# Altium PCB PCB_Handling_module.PcbDoc
Units mm, origin at the board's own origin, x right, y up, seen from the top; angles counter-clockwise.
Board outline 30.25 x 42.25 mm, 2 copper layers (Top Layer, Bottom Layer); 16 components, 56 nets, 73 pads, 2 vias.
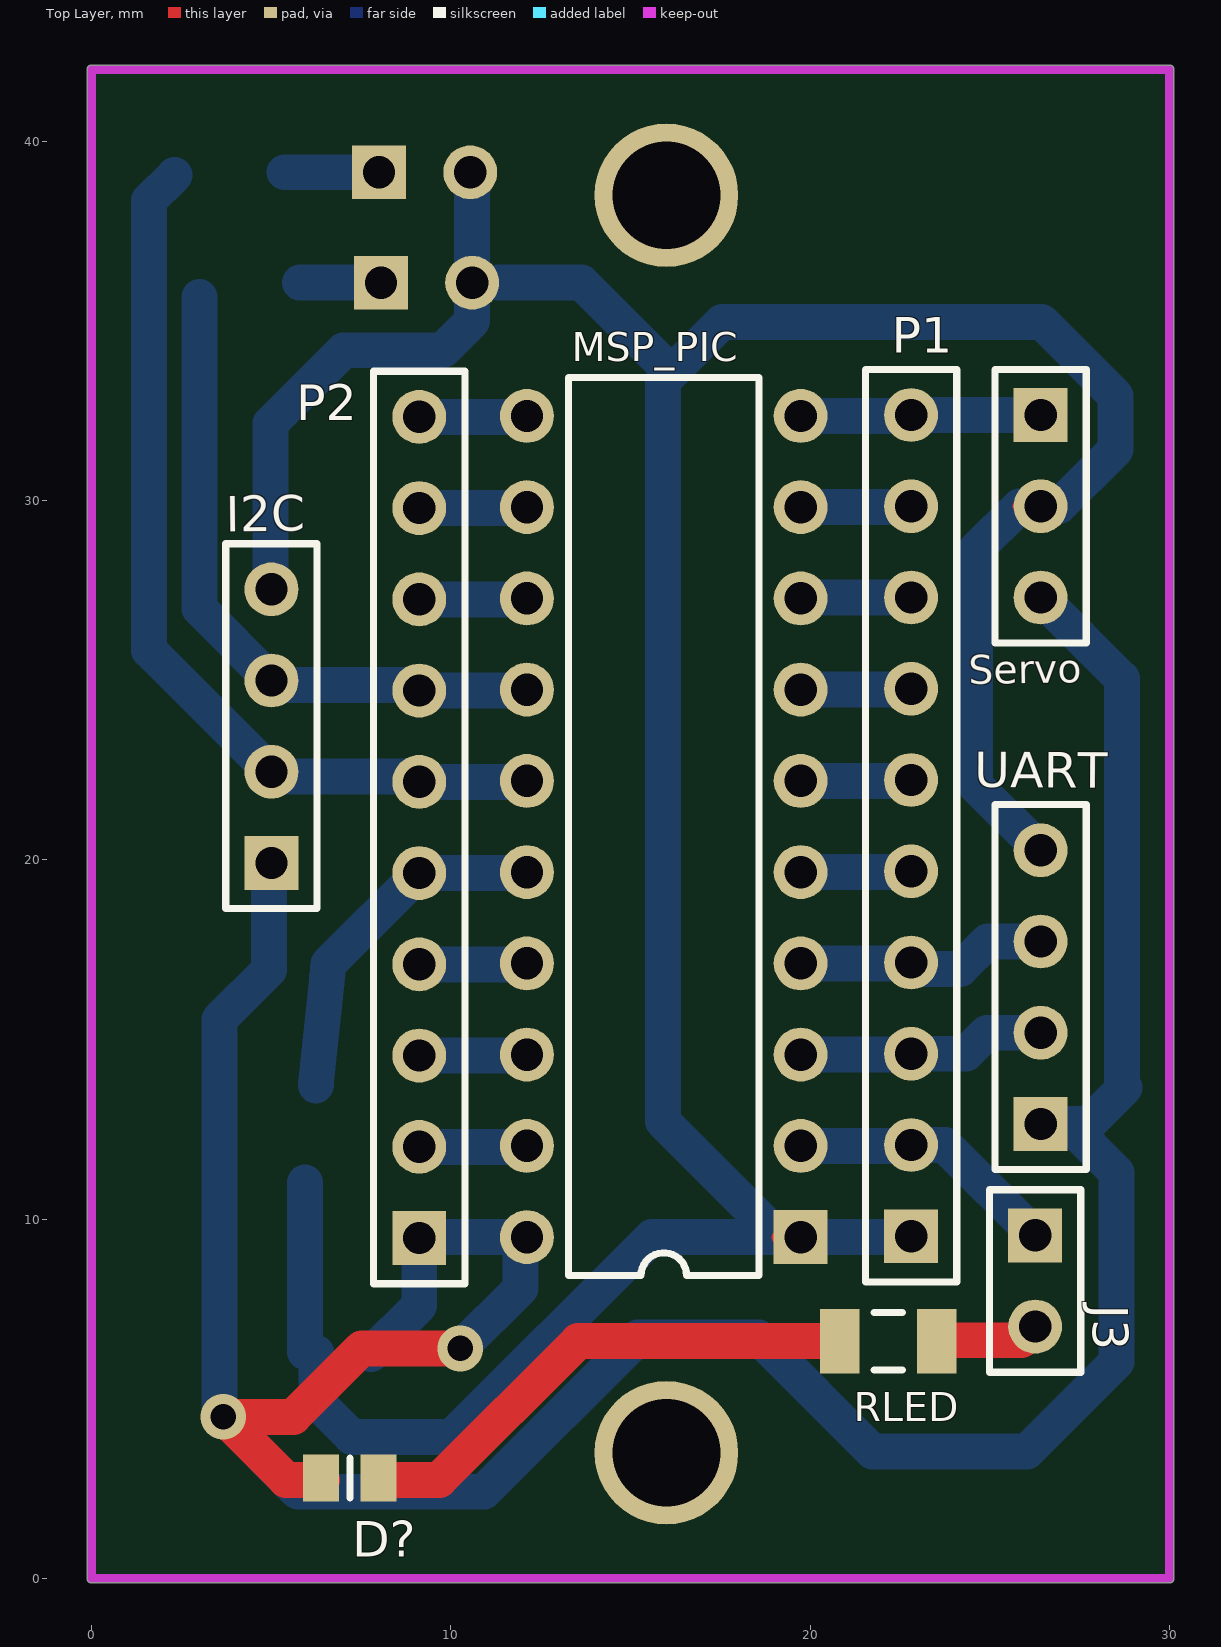
[diagram p0: Top Layer view]
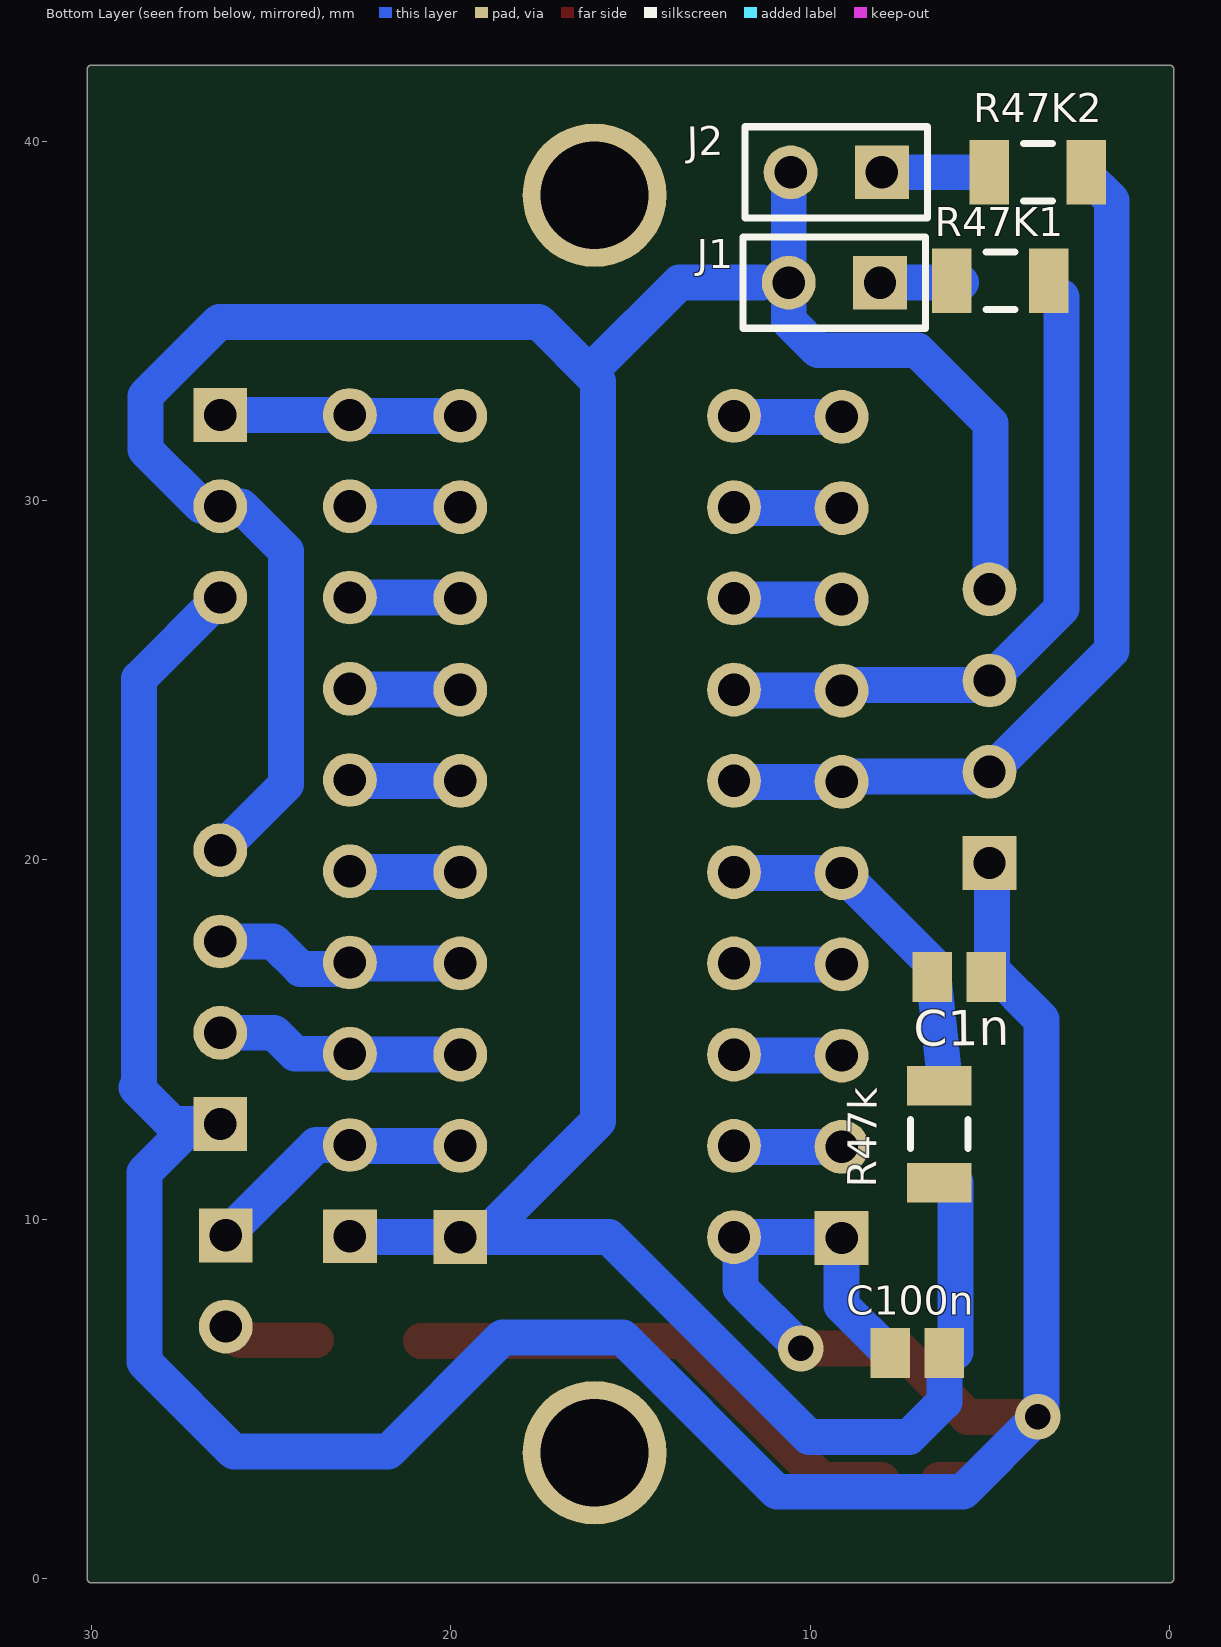
[diagram p1: Bottom Layer view, seen from below]

## Layer stack, top to bottom
Top Solder: solder mask 0.0102, Solder Resist, Dk 3.5
Top Layer: signal copper 0.0356
Dielectric 1: dielectric 0.32, FR-4, Dk 4.8
Bottom Layer: signal copper 0.0356
Bottom Solder: solder mask 0.0102, Solder Resist, Dk 3.5

## Board outline
-0.127,0 ccw(c0,0) 0,-0.127 30,-0.127 ccw(c30,0) 30.127,0 ccw(c30,0) 30.117,0.051 ccw(c30,0.102) 30.127,0.102 30.127,42 ccw(c30,42) 30,42.127 0,42.127 ccw(c0,42) -0.127,42

## Design rules (kind name [scope] priority, off if disabled: settings)
Clearance [All] p1: gap=0.254
PolygonConnect [All] p1: connectstyle=Relief reliefconductorwidth=0.254 reliefentries=4 polygonreliefangle="90 Angle" airgapwidth=0.254
RoomDefinition Sheet_handling_module [InComponentClass('Sheet_handling_module')] p1: confinementstyle=ConfineIn formatcopy=TRUE lockcomponents=FALSE outline -0.124,42.189 30.235,42.189 30.235,0.229 30.081,0.102 -0.124,0.102
RoutingVias [All] p1: holewidth=0.711 width=1.27 viastyle="Through Hole" minholewidth=0.711 minwidth=1.27 maxholewidth=0.711 maxwidth=1.27
SolderMaskExpansion [All] p1: expansion=0.102
Width [All] p1: maxlimit=3 minlimit=0.254 preferedwidth=1 minimp=50.000000 maximp=50.000000 favimp=50.000000
30 further rules are at their usual default settings.

## Components (designator, comment, footprint, x,y, rotation, side; value= is the part's Value field where it differs from the comment)
C1n "Cap Pol3" C0805 5.845,16.739 r180 bottom
C100n "Cap Pol3" C0805 7.013,6.274 r0 bottom
D? "LED3" 6-0805_L 7.191,2.794 r180 top
I2C "I2C_MSP430" HDR1X4 5.006,19.914 r90 top
J1 "Header 2" HDR1X2 8.054,36.068 r0 bottom
J2 "Header 2" HDR1X2 8,39.141 r0 bottom
J3 "Header 2" HDR1X2 26.266,9.55 r270 top
MSP_PIC "Header 10X2A" N020 15.928,20.93 r90 top
P1 "Header 10" HDR1X10 22.812,9.525 r90 top
P2 "Header 10" HDR1X10 9.121,9.474 r90 top
R47k "Res3" INDC3216 6.403,12.37 r270 bottom
R47K1 "Res3" INDC3216 4.702,36.119 r180 bottom
R47K2 "Res3" INDC3216 3.66,39.141 r180 bottom
RLED "Res3" INDC3216 22.177,6.604 r0 top
Servo "Header 3" HDR1X3 26.419,32.385 r270 top
UART "UART_MSP430" HDR1X4 26.419,12.649 r90 top

## Footprints (in the part's own frame and the unit in brackets; to place one, negate y for a bottom-side part, rotate by r counter-clockwise, add the part's x,y. Pads: shape width x height; smd on the part's side, far side on the other; paste and mask are expansions set on the pad)
6-0805_L [mm] "Chip Resistor, Body 2.0x1.2mm, IPC High Density"
  rect 1x1.3 smd: 1(-0.8,0) 2(0.8,0)
  silkscreen extent 0,-0.55 0,0.55, body extent -1.07,-0.7 1.07,0.7, height 0.7
C0805 [mm] "Chip Capacitor, Body 2.0x1.3mm, IPC High Density"
  rect 1.1x1.4 smd: 1(-0.75,0) 2(0.75,0)
  body extent -1.1,-0.72 1.1,0.72, height 1.4
HDR1X2 [mm] "Connector; Header; 2 Position"
  rect 1.5x1.5 hole 0.9: 1(0,0)
  round 1.5 hole 0.9: 2(2.54,0)
  silkscreen extent -1.27,-1.27 3.81,1.27
HDR1X3 [mm] "Connector; Header; 3 Position"
  rect 1.5x1.5 hole 0.9: 1(0,0)
  round 1.5 hole 0.9: 2(2.54,0) 3(5.08,0)
  silkscreen extent -1.27,-1.27 6.35,1.27
HDR1X4 [mm] "Connector; Header; 4 Position"
  rect 1.5x1.5 hole 0.9: 1(0,0)
  round 1.5 hole 0.9: 2(2.54,0) 3(5.08,0) 4(7.62,0)
  silkscreen extent -1.27,-1.27 8.89,1.27
HDR1X10 [mm] "Connector; Header; 10 Position"
  rect 1.5x1.5 hole 0.9: 1(0,0)
  round 1.5 hole 0.9: 2(2.54,0) 3(5.08,0) 4(7.62,0) 5(10.16,0) 6(12.7,0) 7(15.24,0) 8(17.78,0) 9(20.32,0) 10(22.86,0)
  silkscreen extent -1.27,-1.27 24.13,1.27
INDC3216 [mm] "Chip Inductor, Body 3.2x1.6mm, IPC High Density"
  rect 1.1x1.8 smd: 1(-1.35,0) 2(1.35,0)
  silkscreen extent -0.4,-0.8 0.4,0.8, body extent -1.7,-0.9 1.7,0.9, height 0.55
N020 [mm] "DIP; 20 Leads; Row Spacing 7.62 mm; Pitch 2.54 mm"
  rect 1.5x1.5 hole 0.9: 1(-11.43,-3.81)
  round 1.5 hole 0.9: 2(-8.89,-3.81) 3(-6.35,-3.81) 4(-3.81,-3.81) 5(-1.27,-3.81) 6(1.27,-3.81) 7(3.81,-3.81) 8(6.35,-3.81) 9(8.89,-3.81) 10(11.43,-3.81) 11(11.43,3.81) 12(8.89,3.81) 13(6.35,3.81) 14(3.81,3.81) 15(1.27,3.81) 16(-1.27,3.81) 17(-3.81,3.81) 18(-6.35,3.81) 19(-8.89,3.81) 20(-11.43,3.81)
  silkscreen extent -12.5,-2.65 12.5,2.65

## Part data
C1n C100n: "Polarized Capacitor (Surface Mount)"
D?: "Typical BLUE SiC LED"
I2C UART: library part "Header 4", "Header, 4-Pin"
J1 J2 J3: "Header, 2-Pin"
MSP_PIC: "Header, 10-Pin, Dual row"
P1 P2: "Header, 10-Pin"
R47k R47K1 R47K2 RLED: "Resistor"
Servo: "Header, 3-Pin"

## Free pads (board coordinates)
  round 4 hole 3: 2(16,3.5) 2(16,38.5)

## Via types
v1: diameter 1.27, hole 0.711, Top Layer to Bottom Layer, 2 vias

## Nets (pads, with @x,y where several pads share a name; then routed paths per layer and width w, separated by ;. In a path a pad name is that pad's centre, name@x,y a point inside that pad or via, vN(x,y) a via of type N, cw(c..) or ccw(c..) an arc to the next point about the centre after c; other vN are vias at no path point)
3.3V: 
5V: 
5VB: 
GND: 
NetAUX_3: 
NetAUX_6: 
NetAUX_8: 
NetAUX_10: 
NetAUX_11: 
NetAUX_12: 
NetC1n_1: C1n.1 MSP_PIC.16 P2.5 R47k.1 | length 9.7
  Top Layer w0.4: MSP_PIC.16@12.093,19.634 MSP_PIC.16
  Bottom Layer w0.4: R47k.1@6.239,13.682 R47k.1@6.239,13.72
  Bottom Layer w1: R47k.1@6.239,13.72 6.241,13.737 6.556,16.743 6.595,17.108 P2.5 ; P2.5@9.477,19.634 MSP_PIC.16@12.093,19.634
NetC1n_2: C1n.2 C100n.2 D?.2 I2C.1 MSP_PIC.20 P2.1 Servo.3 UART.1 | length 91.6
  Top Layer w1: D?.2@6.416,2.743 5.413,2.743 v1(3.66,4.496) 5.616,4.496 7.521,6.401 v1(10.264,6.401)
  Bottom Layer w0.4: MSP_PIC.20 MSP_PIC.20@12.271,9.347
  Bottom Layer w1: v1@3.559,4.521 3.559,15.558 4.941,16.941 4.941,19.849 I2C.1 ; v1(3.66,4.496) 5.743,2.413 10.922,2.413 15.215,6.706 18.567,6.706 21.742,3.531 26.038,3.531 28.527,6.02 28.527,11.303 27.181,12.649 ; C100n.2@7.775,6.248 9.121,7.595 P2.1 ; P2.1@9.502,9.5 MSP_PIC.20 ; v1(10.264,6.401) 11.941,8.077 11.941,9.017 MSP_PIC.20@12.271,9.347 ; UART.1 27.181,12.649 ; Servo.3 28.679,25.044 28.679,13.665 ; 28.755,13.665 27.739,12.649 27.181,12.649
NetC100n_1: C100n.1 I2C.4 J1.2 J2.2 MSP_PIC.1 P1.1 R47k.2 Servo.2 UART.4 | length 102.4
  Top Layer w0.4: MSP_PIC.1@19.129,9.5 MSP_PIC.1 ; P1.1@22.786,9.5 P1.1 ; Servo.2@25.834,29.845 Servo.2 Servo.2@26.927,29.845
  Bottom Layer w1: I2C.4@4.981,27.305 4.981,32.156 7.013,34.188 9.782,34.188 10.594,35.001 J1.2 J2.2@10.594,39.319 ; C100n.1@5.946,6.301 R47k.2@5.946,11.02 ; C100n.1 6.263,4.913 7.239,3.937 10.033,3.937 15.596,9.5 MSP_PIC.1@19.129,9.5 ; J1.2@11.331,36.068 13.642,36.068 15.903,33.807 ; P1.1@22.786,9.5 MSP_PIC.1 MSP_PIC.1@19.129,9.5 ; Servo.2@25.834,29.845 24.59,28.6 24.59,22.098 UART.4 ; Servo.2@26.927,29.845 28.501,31.42 28.501,32.918 26.444,34.976 17.554,34.976 15.903,33.325 15.903,12.725 MSP_PIC.1@19.129,9.5
NetCZ_2_1: 
NetCZ_2_2: 
NetCZ_3_4: 
NetCZ_3_5: 
NetCZ_3_6: 
NetCZ_3_7: 
NetCZ_3_8: 
NetCZ_4_1: 
NetCZ_4_2: 
NetCZ_4_3: 
NetCZ_4_4: 
NetCZ_4_6: 
NetCZ_4_9: 
NetCZ_4_10: 
NetD?_1: D?.1 RLED.1 | length 14.4
  Top Layer w1: D?.1@8.016,2.743 9.68,2.743 13.541,6.604 RLED.1
NetI2C_2: I2C.2 MSP_PIC.15 P2.6 R47K2.2 | length 24.9
  Top Layer w0.4: P2.6@8.969,22.327 P2.6 ; MSP_PIC.15@12.093,22.174 MSP_PIC.15
  Bottom Layer w1: R47K2.2@2.31,39.065 1.603,38.358 1.603,25.832 I2C.2@5.108,22.327 ; I2C.2@5.464,22.327 P2.6@8.969,22.327 ; P2.6@9.477,22.174 MSP_PIC.15@12.093,22.174
NetI2C_3: I2C.3 MSP_PIC.14 P2.7 R47K1.2 | length 17.9
  Top Layer w0.4: P2.7@8.969,24.867 P2.7 ; MSP_PIC.14@12.093,24.714 MSP_PIC.14
  Bottom Layer w1: R47K1.2@3,35.665 3,27 I2C.3 ; I2C.3@5.464,24.867 P2.7@8.969,24.867 ; P2.7@9.477,24.714 MSP_PIC.14@12.093,24.714
NetI2C_O2_2: 
NetI2C_O2_3: 
NetJ1_1: J1.1 R47K1.1 | length 2.3
  Bottom Layer w1: R47K1.1@5.794,36.068 J1.1
NetJ2_1: J2.1 R47K2.1 | length 2.6
  Bottom Layer w1: R47K2.1@5.366,39.141 J2.1
NetJ3_1: J3.1 MSP_PIC.2 P1.2 | length 7.6
  Top Layer w0.4: P1.2@22.786,12.04 P1.2
  Bottom Layer w1: MSP_PIC.2 P1.2@22.786,12.04 ; P1.2 23.752,12.065 J3.1
NetJ3_2: J3.2 RLED.2 | length 2.7
  Top Layer w1: RLED.2@23.755,6.629 25.885,6.629 J3.2
NetMSP_PIC_3: MSP_PIC.3 P1.3 UART.2 | length 6.9
  Top Layer w0.4: P1.3@22.786,14.58 P1.3
  Bottom Layer w1: MSP_PIC.3 P1.3@22.786,14.58 ; P1.3 24.336,14.605 24.92,15.189 UART.2
NetMSP_PIC_4: MSP_PIC.4 P1.4 UART.3 | length 7.1
  Top Layer w0.4: P1.4@22.786,17.12 P1.4 P1.4@22.99,16.967
  Bottom Layer w1: MSP_PIC.4 P1.4@22.786,17.12 ; P1.4@22.99,16.967 24.183,16.967 24.945,17.729 UART.3
NetMSP_PIC_5: MSP_PIC.5 P1.5 | length 3.1
  Top Layer w0.4: P1.5@22.786,19.66 P1.5
  Bottom Layer w1: MSP_PIC.5 P1.5@22.786,19.66
NetMSP_PIC_6: MSP_PIC.6 P1.6 | length 3.1
  Top Layer w0.4: P1.6@22.786,22.2 P1.6
  Bottom Layer w1: MSP_PIC.6 P1.6@22.786,22.2
NetMSP_PIC_7: MSP_PIC.7 P1.7 | length 3.1
  Top Layer w0.4: P1.7@22.786,24.74 P1.7
  Bottom Layer w1: MSP_PIC.7 P1.7@22.786,24.74
NetMSP_PIC_8: MSP_PIC.8 P1.8 | length 3.1
  Top Layer w0.4: MSP_PIC.8 MSP_PIC.8@19.764,27.305
  Bottom Layer w1: MSP_PIC.8@19.764,27.305 P1.8
NetMSP_PIC_9: MSP_PIC.9 P1.9 | length 3.1
  Top Layer w0.4: P1.9@22.786,29.82 P1.9
  Bottom Layer w1: MSP_PIC.9 P1.9@22.786,29.82
NetMSP_PIC_10: MSP_PIC.10 P1.10 Servo.1 | length 6.7
  Top Layer w0.4: P1.10@22.786,32.36 P1.10
  Bottom Layer w1: MSP_PIC.10 P1.10@22.786,32.36 ; P1.10 Servo.1
NetMSP_PIC_11: MSP_PIC.11 P2.10 | length 2.7
  Top Layer w0.4: MSP_PIC.11@12.093,32.334 MSP_PIC.11
  Bottom Layer w1: P2.10@9.477,32.334 MSP_PIC.11@12.093,32.334
NetMSP_PIC_12: MSP_PIC.12 P2.9 | length 2.7
  Top Layer w0.4: MSP_PIC.12@12.093,29.794 MSP_PIC.12
  Bottom Layer w1: P2.9@9.477,29.794 MSP_PIC.12@12.093,29.794
NetMSP_PIC_13: MSP_PIC.13 P2.8 | length 2.7
  Top Layer w0.4: MSP_PIC.13@12.093,27.254 MSP_PIC.13
  Bottom Layer w1: P2.8@9.477,27.254 MSP_PIC.13@12.093,27.254
NetMSP_PIC_17: MSP_PIC.17 P2.4 | length 2.7
  Top Layer w0.4: MSP_PIC.17@12.093,17.094 MSP_PIC.17
  Bottom Layer w1: P2.4@9.477,17.094 MSP_PIC.17@12.093,17.094
NetMSP_PIC_18: MSP_PIC.18 P2.3 | length 2.7
  Top Layer w0.4: MSP_PIC.18@12.093,14.554 MSP_PIC.18
  Bottom Layer w1: P2.3@9.477,14.554 MSP_PIC.18@12.093,14.554
NetMSP_PIC_19: MSP_PIC.19 P2.2 | length 2.7
  Top Layer w0.4: MSP_PIC.19@12.093,12.014 MSP_PIC.19
  Bottom Layer w1: P2.2@9.477,12.014 MSP_PIC.19@12.093,12.014
NetOdroidC2_8: 
NetOdroidC2_10: 
NetOdroidC2_37: 
NetOPA2_1: 
NetOUT+_1: 
NetOUT-_1: 

## Keep-outs
Top Layer:
  lines w0.254: 30,0 0,0 0,42 30,42 30,0.102